# EAGLE board ribbon - Copy (EAGLE 8.3.1)
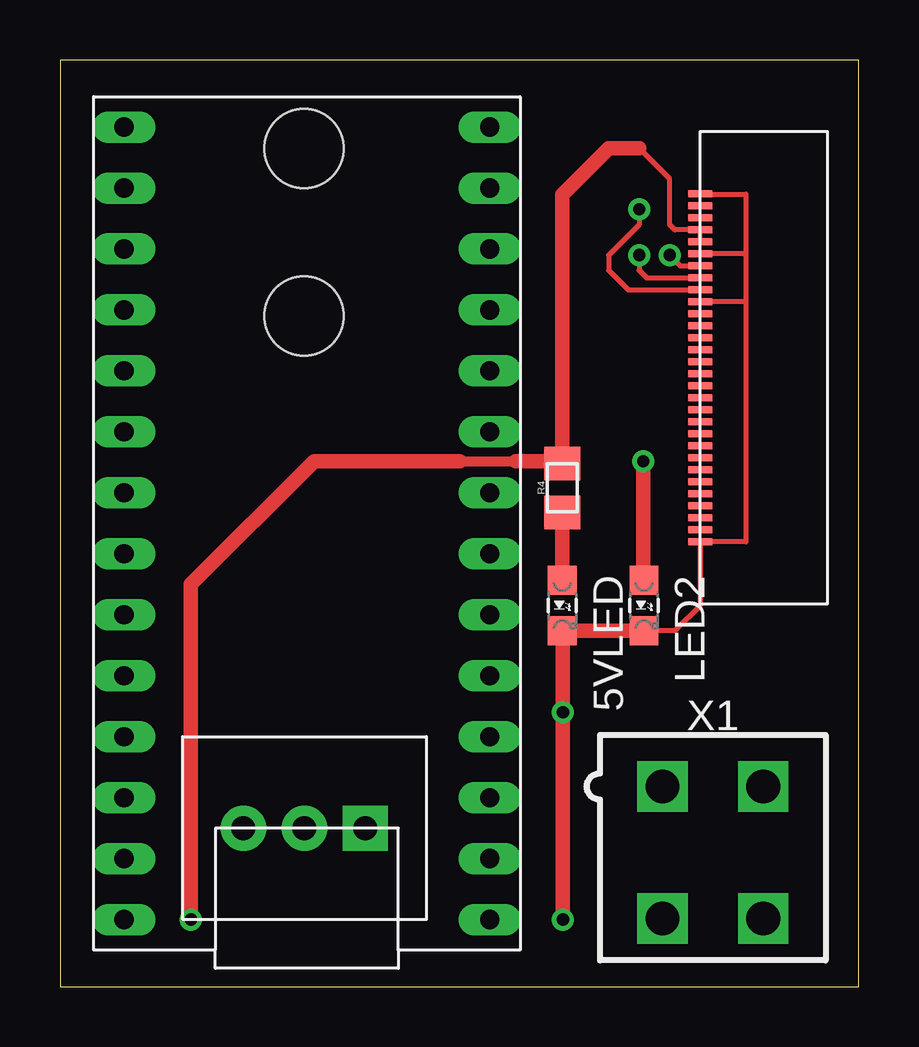
[diagram p0: board, top side]
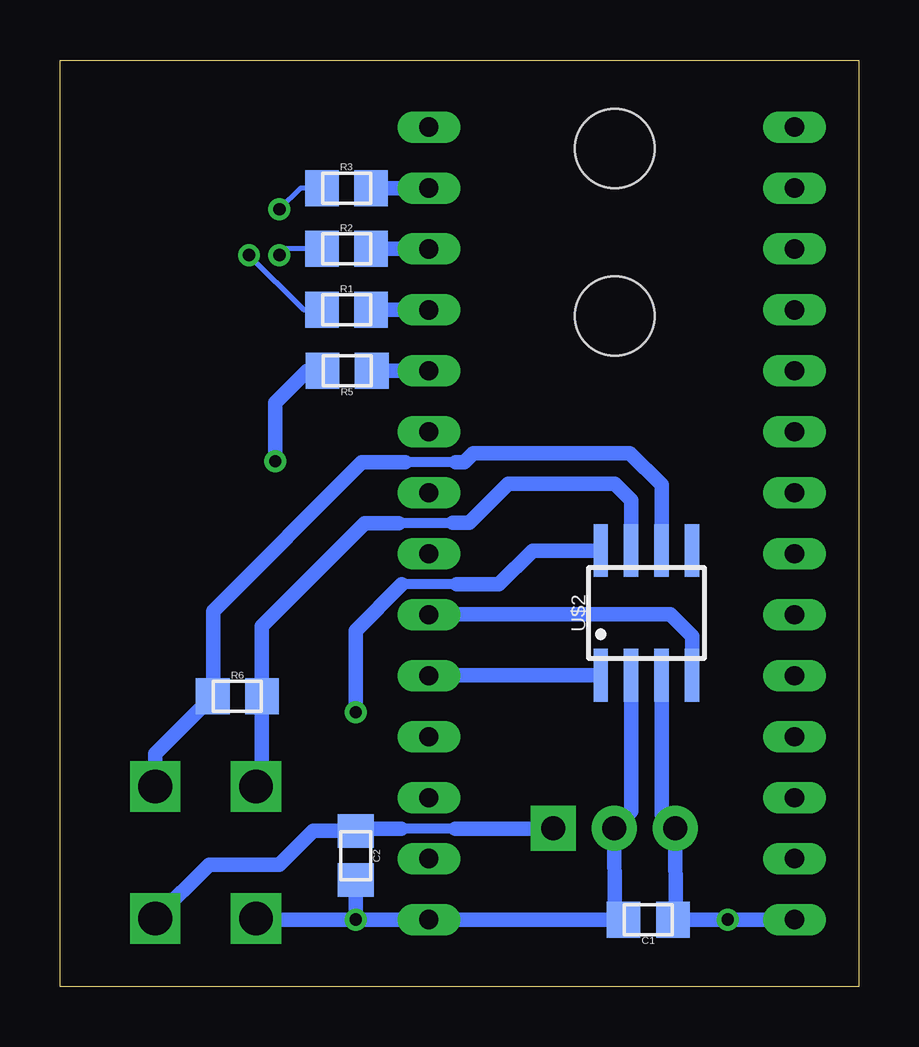
[diagram p1: board, bottom side, seen from below]

Size 33.27 x 38.61 mm. Coordinates in mm from the lower left corner, seen from the top.
Outline: 0,0 33.27,0 33.27,38.61 0,38.61 0,0
Copper layers (1*16): Top 0.035mm / dielectric 1.5mm / Bottom 0.035mm
Design rules "hytech *": minimum track width 6mil, minimum drill 0.35mm, track to track 6mil, track to pad 6mil, pad to pad 6mil, via to via 6mil, smd to smd 6mil, copper to edge 40mil, drill to drill 6mil, minimum pad ring 10mil, minimum via ring 8mil, stop-mask expansion 4mil, vias tented up to drill 0mil, thermal gap 10mil
Holes 3.3 mm at 10.16,34.92 10.16,27.94

## Footprints (pad centres in the part's own frame; a part is rotated, then mirrored left to right if it is on the bottom)
LED-805 = smd 1.2 x 1.2: A 0,-1.05; C 0,1.05
0805 = smd 1.4 x 1.5: 1 -1.025,0; 2 1.025,0
TO-220 = drill 1 pad 1.88 square: 1 -2.54,0 | drill 1 pad 1.88: 2 0,0; 3 2.54,0
TEENSY_3.2_SIMPLE = drill 0.8 long: 3.3V 16.51,29.21; A0 16.51,3.81; A1 16.51,6.35; A2 16.51,8.89; A3 16.51,11.43; A4 16.51,13.97; A5 16.51,16.51; A6 16.51,19.05; A7 16.51,21.59; A8 16.51,24.13; A9 16.51,26.67; AGND 16.51,31.75; D0(RX1) 1.27,31.75; D1(TX1) 1.27,29.21; D2 1.27,26.67; D3(CANTX) 1.27,24.13; D4(CANRX) 1.27,21.59; D5 1.27,19.05; D6 1.27,16.51; D7(RX3) 1.27,13.97; D8(TX3) 1.27,11.43; D9(RX2) 1.27,8.89; D10(TX2) 1.27,6.35; D11 1.27,3.81; D12 1.27,1.27; D13 16.51,1.27; GND 1.27,34.29; VIN 16.51,34.29
SOIC-08 = smd 0.6 x 2.2: 1 -1.905,-2.6; 2 -0.635,-2.6; 3 0.635,-2.6; 4 1.905,-2.6; 5 1.905,2.6; 6 0.635,2.6; 7 -0.635,2.6; 8 -1.905,2.6
FFC-30P-0.5MM = smd 1 x 0.284: 1 0,7.5; 2 0,7; 3 0,6.5; 4 0,6; 5 0,5.5; 6 0,5; 7 0,4.5; 8 0,4; 9 0,3.5; 10 0,3; 11 0,2.5; 12 0,2; 13 0,1.5; 14 0,1; 15 0,0.5; 16 0,0; 17 0,-0.5; 18 0,-1; 19 0,-1.5; 20 0,-2; 21 0,-2.5; 22 0,-3; 23 0,-3.5; 24 0,-4; 25 0,-4.5; 26 0,-5; 27 0,-5.5; 28 0,-6; 29 0,-6.5; 30 0,-7
MINIFIT_5566-4 = drill 1.4 square: 1 2.1,-2.75; 2 -2.1,-2.75; 3 2.1,2.75; 4 -2.1,2.75

## Placement (x,y rotation side)
5VLED  [LED-805]  20.93,15.88 180 top
C1  [0805]  8.76,2.79 180 bottom
C2  [0805]  20.95,5.46 270 bottom
IC1  [TO-220]  10.19,6.6 180 top
LED2  [LED-805]  24.33,15.88 180 top
R1  68  [0805]  21.34,28.19 0 bottom
R2  68  [0805]  21.34,30.73 0 bottom
R3  68  [0805]  21.34,33.27 0 bottom
R4  450  [0805]  20.93,20.78 90 top
R5  450  [0805]  21.31,25.65 180 bottom
R6  120  [0805]  25.88,12.09 0 bottom
U$1  TEENSY_3.2_SIMPLE  [TEENSY_3.2_SIMPLE]  19.18,37.08 180 top
U$2  MCP2551  [SOIC-08]  8.84,15.57 0 bottom
U$3  FFC-30P-0.5MM  [FFC-30P-0.5MM]  26.67,26.04 180 top
X1  CONNECTOR-4  [MINIFIT_5566-4]  27.2,5.59 180 top

## Library data of the parts
5VLED C1 C2 IC1 LED2 R1-R6 U$1-U$3 = HyTechDevices
X1 = HyTechDevices; OC_FARNELL: unknown; OC_NEWARK: unknown

## Nets
+5V: C1.1 IC1.3 R4.2 U$1.VIN U$2.3 U$3.26 U$3.27
+12V: C2.1 IC1.1 X1.4
CANH: R6.2 U$2.7 X1.1
CANL: R6.1 U$2.6 X1.2
CANRX: U$1.D4(CANRX) U$2.4
CANTX: U$1.D3(CANTX) U$2.1
DISP_RX: R2.1 U$3.23
DISP_TX: R1.1 U$3.24
GND: 5VLED.C C1.2 C2.2 IC1.2 LED2.C U$1.GND U$2.2 U$2.8 U$3.1 U$3.21 U$3.25 U$3.30 X1.3
N$1: R1.2 U$1.D9(RX2)
N$2: R2.2 U$1.D10(TX2)
N$3: R3.2 U$1.D11
N$4: 5VLED.A R4.1
N$5: LED2.A R5.2
N$6: R5.1 U$1.D8(TX3)
RESET: R3.1 U$3.22

## Tracks (layer width: path | path; a pad name or v marks a point on that pad's centre or on a via)
+5V  (via drill 0.51)
  Top 0.203: 25.36,33.7 24.13,34.92 | 25.36,33.7 25.4,33.66 | U$3.26 U$3.27 25.61,31.54 25.4,31.75 25.4,33.66 | 25.4,33.66 25.36,33.7
  Top 0.406: 16.66,21.89 19,21.89
  Top 0.61: 16.66,21.89 10.59,21.89 5.46,16.76 v5.46,2.79 | 19,21.89 20.84,21.89 R4.2 20.93,32.99 22.86,34.92 24.13,34.92
  Bottom 0.61: U$1.VIN v5.46,2.79 C1.1 7.62,2.91 IC1.3 8.2,7.16 U$2.3
+12V
  Bottom 0.406: 16.82,6.58 19.05,6.58
  Bottom 0.61: 16.82,6.58 13.56,6.58 IC1.1 | 19.05,6.58 20.86,6.58 C2.1 22.72,6.49 24.13,5.08 27.06,5.08 X1.4
CANH
  Bottom 0.406: 19.15,19.3 19.13,19.33 16.92,19.33
  Bottom 0.61: 19.15,19.3 20.57,19.3 24.86,15.02 R6.2 24.86,8.58 X1.1 | 16.92,19.33 16.23,19.33 14.61,20.95 10.16,20.95 9.47,20.27 U$2.7
CANL
  Bottom 0.406: 16.79,21.84 18.9,21.84
  Bottom 0.61: U$2.6 8.2,20.9 9.53,22.23 16.05,22.23 16.43,21.84 16.79,21.84 | 18.9,21.84 20.7,21.84 26.9,15.65 R6.1 29.3,9.7 X1.2
CANRX
  Bottom 0.61: U$2.4 6.93,14.61 7.85,15.52 17.88,15.52 U$1.D4(CANRX)
CANTX
  Bottom 0.61: U$2.1 17.89,12.97 U$1.D3(CANTX)
DISP_RX  (via drill 0.51)
  Top 0.203: v24.13,30.48 24.13,29.84 24.44,29.54 U$3.23
  Bottom 0.203: R2.1 23.88,30.73 v24.13,30.48
DISP_TX  (via drill 0.51)
  Top 0.203: v25.4,30.48 25.84,30.04 U$3.24
  Bottom 0.203: R1.1 23.11,28.19 v25.4,30.48
GND  (via drill 0.51)
  Top 0.203: U$3.30 26.68,33.02 28.57,33.02 28.57,30.48 | 28.57,30.48 28.52,30.54 U$3.25 | 28.57,30.48 28.57,28.57 | 28.57,28.57 28.54,28.54 U$3.21 | 28.57,28.57 28.57,18.54 U$3.1 26.67,15.88 25.62,14.82 LED2.C
  Top 0.61: LED2.C 5VLED.C | 5VLED.C 20.95,14.77 | 5VLED.C 20.95,14.8 | 5VLED.C 20.95,14.8 | 20.95,14.8 v20.95,11.43 v20.95,2.79
  Bottom 0.406: 16.74,16.76 19.02,16.76
  Bottom 0.61: 17.91,2.84 U$1.GND | U$1.GND C1.2 10.16,3.17 IC1.2 9.47,7.32 U$2.2 | v20.95,2.79 U$1.GND | v20.95,2.79 25.06,2.79 X1.3 | U$2.8 13.58,18.17 14.99,16.76 16.74,16.76 | 19.02,16.76 20.95,14.83 v20.95,11.43 | C2.2 v20.95,2.79
N$1
  Bottom 0.61: R1.2 U$1.D9(RX2)
N$2
  Bottom 0.61: R2.2 U$1.D10(TX2)
N$3
  Bottom 0.61: R3.2 U$1.D11
N$4
  Top 0.61: R4.1 5VLED.A
N$5  (via drill 0.51)
  Top 0.61: LED2.A 24.31,16.95 v24.31,21.89
  Bottom 0.61: v24.31,21.89 24.31,24.32 22.97,25.65 R5.2
N$6
  Bottom 0.61: R5.1 U$1.D8(TX3)
RESET  (via drill 0.51)
  Top 0.203: v24.13,32.38 24.13,31.75 22.86,30.48 22.86,29.84 23.67,29.04 U$3.22
  Bottom 0.203: R3.1 23.24,33.27 v24.13,32.38